# EAGLE board magnetorquer_extension_board_f1 (EAGLE 8.4.2)
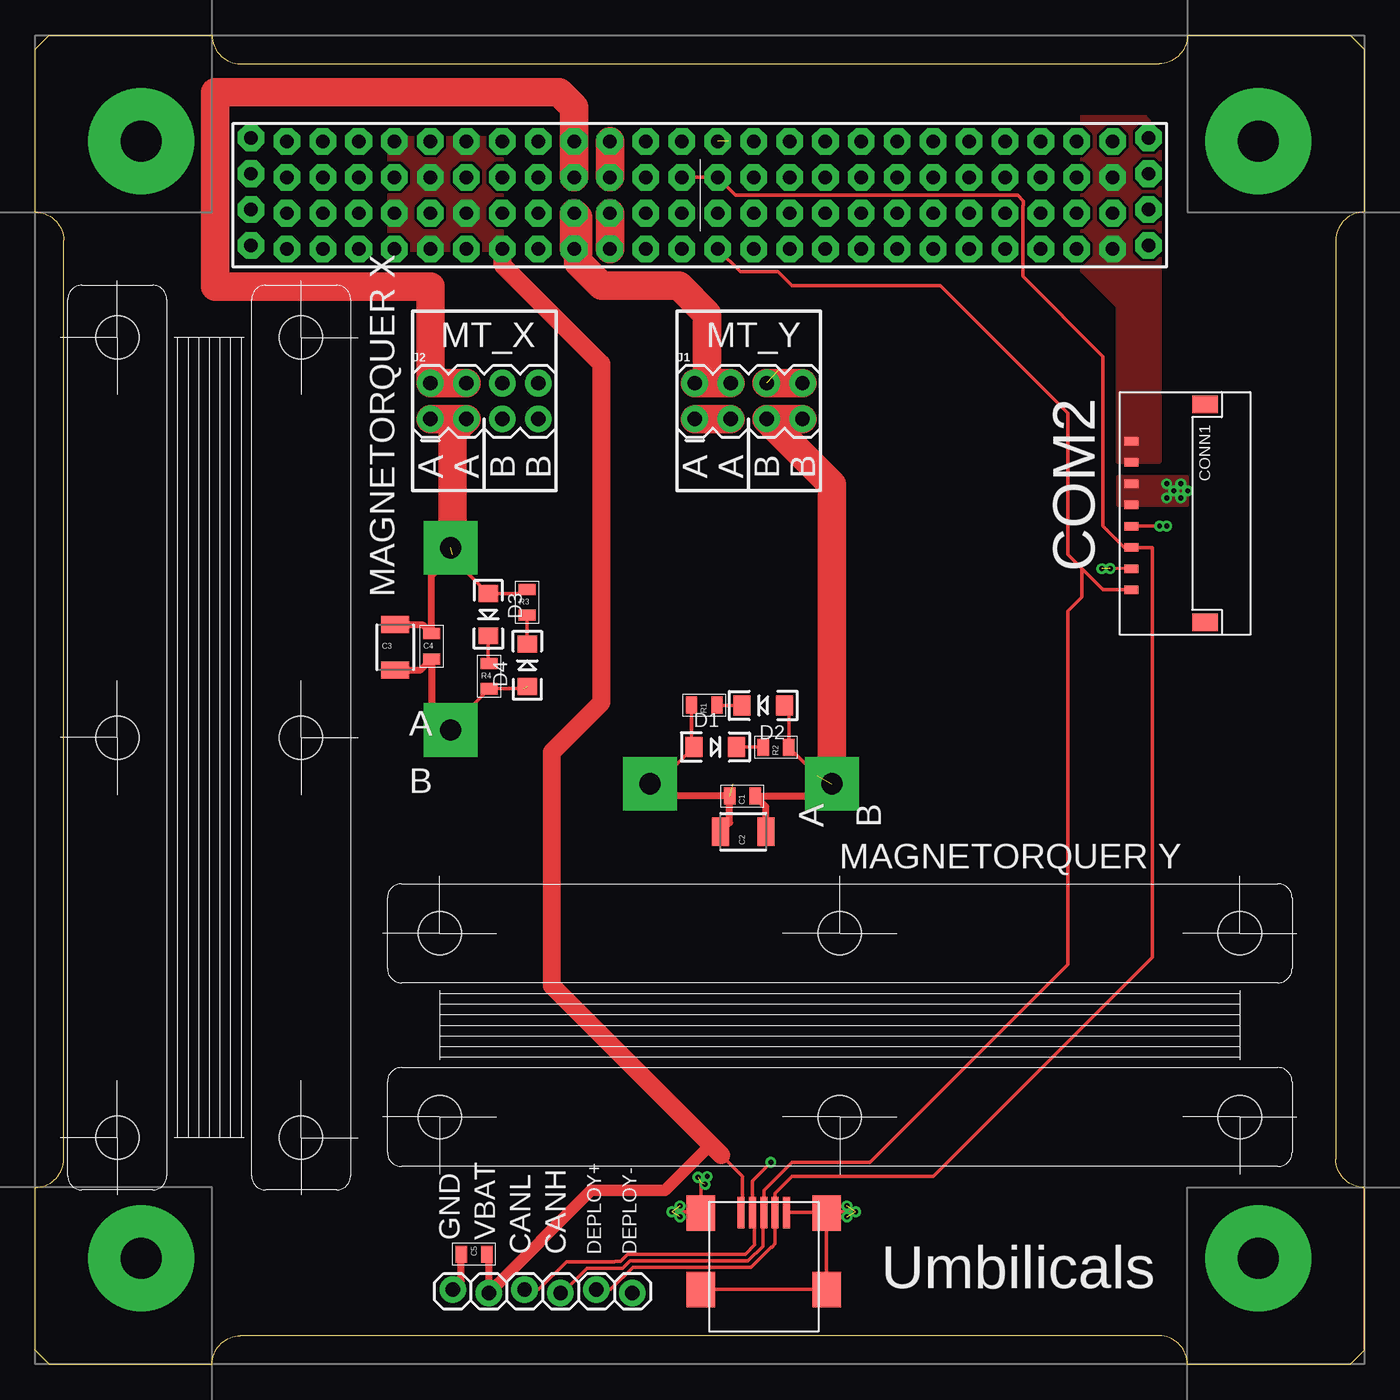
[diagram p0: board, top side]
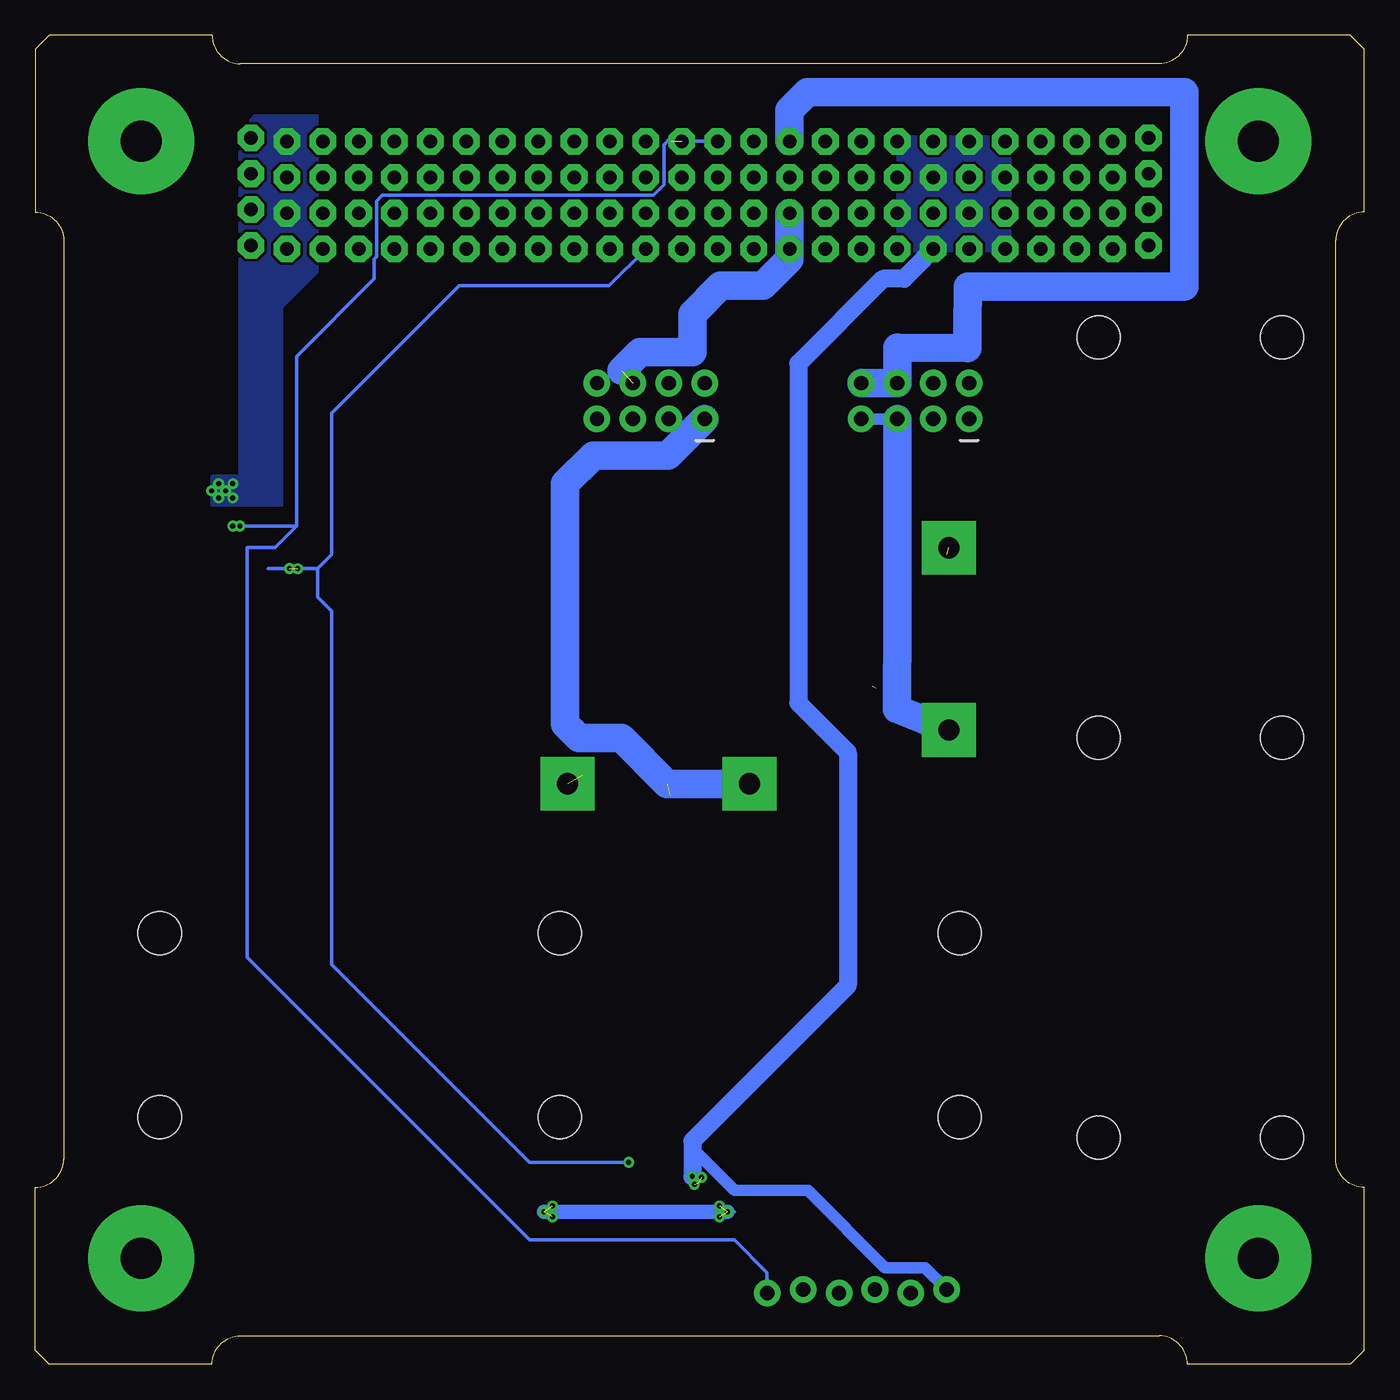
[diagram p1: board, bottom side, seen from below]

Size 94 x 94 mm. Coordinates in mm from the lower left corner, seen from the top.
Copper layers (1*16): Top 0.035mm / dielectric 1.5mm / Bottom 0.035mm
Design rules "default *": minimum track width 10mil, minimum drill 0.4mm, track to track 8mil, track to pad 8mil, pad to pad 8mil, via to via 8mil, smd to smd 6mil, copper to edge 40mil, drill to drill 6mil, minimum pad ring 10mil, minimum via ring 8mil, stop-mask expansion 4mil, vias tented up to drill 0mil, thermal gap 10mil

## Footprints (pad centres in the part's own frame; a part is rotated, then mirrored left to right if it is on the bottom)
0805 = smd 0.8 x 1.2: 1 -0.9,0; 2 0.9,0
1210 = smd 1.2 x 2: 1 -1.6,0; 2 1.6,0
PICOLOCK_8 = smd 1.25 x 1.8: MNT@1 -2.605,5.2; MNT@2 12.805,5.2 | smd 0.6 x 1: P$1 0,0; P$2 1.5,0; P$3 3,0; P$4 4.5,0; P$5 6,0; P$6 7.5,0; P$7 9,0; P$8 10.5,0
LED-1206 = smd 1.2 x 1.4: A -1.5,0; C 1.5,0
2X4 = drill 1.016 pad 1.88: 1 -3.81,-1.27; 2 -3.81,1.27; 3 -1.27,-1.27; 4 -1.27,1.27; 5 1.27,-1.27; 6 1.27,1.27; 7 3.81,-1.27; 8 3.81,1.27
1X06_LOCK = drill 1.016 pad 1.88: 1 0,0; 2 2.54,-0.254; 3 5.08,0; 4 7.62,-0.254; 5 10.16,0; 6 12.7,-0.254
MT_AIRCORE_HORIZONTAL = drill 1.5 pad 3.81 square: A 18.57,27.08; B 31.46,27.08 | hole 3.05: 3.7,16.5; 32,16.5; 60.3,16.5; 60.3,3.5; 32,3.5; 3.7,3.5
PC104_CONNECTOR = drill 0.953 pad 1.88 octagon: P$1 -31.75,32.134; P$2 -31.75,34.674; P$3 -31.75,37.214; P$4 -31.75,39.754; P$5 -29.21,31.88; P$6 -29.21,34.42; P$7 -29.21,36.96; P$8 -29.21,39.5; P$9 -26.67,31.88; P$10 -26.67,34.42; P$11 -26.67,36.96; P$12 -26.67,39.5; P$13 -24.13,31.88; P$14 -24.13,34.42; P$15 -24.13,36.96; P$16 -24.13,39.5; P$17 -21.59,31.88; P$18 -21.59,34.42; P$19 -21.59,36.96; P$20 -21.59,39.5; P$21 -19.05,31.88; P$22 -19.05,34.42; P$23 -19.05,36.96; P$24 -19.05,39.5; P$25 -16.51,31.88; P$26 -16.51,34.42; P$27 -16.51,36.96; P$28 -16.51,39.5; P$29 -13.97,31.88; P$30 -13.97,34.42; P$31 -13.97,36.96; P$32 -13.97,39.5; P$33 -11.43,31.88; P$34 -11.43,34.42; P$35 -11.43,36.96; P$36 -11.43,39.5; P$37 -8.89,31.88; P$38 -8.89,34.42; P$39 -8.89,36.96; P$40 -8.89,39.5; P$41 -6.35,31.88; P$42 -6.35,34.42; P$43 -6.35,36.96; P$44 -6.35,39.5; P$45 -3.81,31.88; P$46 -3.81,34.42; P$47 -3.81,36.96; P$48 -3.81,39.5; P$49 -1.27,31.88; P$50 -1.27,34.42; P$51 -1.27,36.96; P$52 -1.27,39.5; P$53 1.27,31.88; P$54 1.27,34.42; P$55 1.27,36.96; P$56 1.27,39.5; P$57 3.81,31.88; P$58 3.81,34.42; P$59 3.81,36.96; P$60 3.81,39.5; P$61 6.35,31.88; P$62 6.35,34.42; P$63 6.35,36.96; P$64 6.35,39.5; P$65 8.89,31.88; P$66 8.89,34.42; P$67 8.89,36.96; P$68 8.89,39.5; P$69 11.43,31.88; P$70 11.43,34.42; P$71 11.43,36.96; P$72 11.43,39.5; P$73 13.97,31.88; P$74 13.97,34.42; P$75 13.97,36.96; P$76 13.97,39.5; P$77 16.51,31.88; P$78 16.51,34.42; P$79 16.51,36.96; P$80 16.51,39.5; P$81 19.05,31.88; P$82 19.05,34.42; P$83 19.05,36.96; P$84 19.05,39.5; P$85 21.59,31.88; P$86 21.59,34.42; P$87 21.59,36.96; P$88 21.59,39.5; P$89 24.13,31.88; P$90 24.13,34.42; P$91 24.13,36.96; P$92 24.13,39.5; P$93 26.67,31.88; P$94 26.67,34.42; P$95 26.67,36.96; P$96 26.67,39.5; P$97 29.21,31.88; P$98 29.21,34.42; P$99 29.21,36.96; P$100 29.21,39.5; P$101 31.75,32.134; P$102 31.75,34.674; P$103 31.75,37.214; P$104 31.75,39.754
BOARD_TEMPLATE_SECURED = drill 2.9 pad 7.5: P$1 -39.5,39.5; P$2 -39.5,-39.5; P$3 39.5,-39.5; P$4 39.5,39.5
USB_MINI_B = smd 0.5 x 2.25: DATA+ 0,5.45; DATA- -0.8,5.45; GROUND 1.6,5.45; ID 0.8,5.45; VCC -1.6,5.45 | smd 2 x 2.5: GND1 -4.45,0; GND2 -4.45,5.42; GND3 4.45,0; GND4 4.45,5.42

## Placement (x,y rotation side)
C1  [0805]  50.01,40.19 0 top
C2  [1210]  50.08,37.67 0 top
C3  [1210]  25.45,50.72 270 top
C4  [0805]  28.03,50.78 270 top
C5  .1u  [0805]  31.03,7.78 180 top
CONN1  PICOLOCK_8PICOLOCK_8  [PICOLOCK_8]  77.53,65.28 270 top
D1  [LED-1206]  48.1,43.65 0 top
D2  [LED-1206]  51.5,46.6 180 top
D3  [LED-1206]  32.04,53.03 270 top
D4  [LED-1206]  34.8,49.45 90 top
J1  [2X4]  50.46,68.13 0 top
J2  [2X4]  31.76,68.13 0 top
JP1  [1X06_LOCK]  29.53,5.28 0 top
MT_X  MT_AIRCORE_HORIZONTAL  [MT_AIRCORE_HORIZONTAL]  24.9,13.98 0 top
MT_Y  MT_AIRCORE_HORIZONTAL  [MT_AIRCORE_HORIZONTAL]  2.3,76.32 270 top
R1  [0805]  47.32,46.61 0 top
R2  [0805]  52.39,43.63 0 top
R3  [0805]  34.78,53.9 270 top
R4  [0805]  32.1,48.67 270 top
U$1  PC104_CONNECTOR  [PC104_CONNECTOR]  47,47 0 top
U$2  BOARD_TEMPLATESERCURED  [BOARD_TEMPLATE_SECURED]  47,47 0 top
U$3  USB_MINI-B_AMPHENOL  [USB_MINI_B]  51.53,5.28 0 top

## Library data of the parts
C1-C5 CONN1 D1-D4 MT_X MT_Y R1-R4 U$1 U$2 = DubSat1 Components
J1 J2 JP1 = SparkFun-Connectors
U$3 = I_O_connectors

## Nets
CANH: CONN1.P$8 JP1.4 U$1.P$53 U$3.DATA+
CANL: CONN1.P$7 JP1.3 U$1.P$57 U$3.DATA-
COM2_GND: CONN1.P$3 CONN1.P$4 U$1.P$98 U$1.P$100
COM2_VBAT: CONN1.P$1 CONN1.P$2 U$1.P$97 U$1.P$99
GND: C5.2 JP1.1 U$1.P$17 U$1.P$19 U$1.P$22 U$1.P$24 U$1.P$25 U$1.P$27 U$1.P$30 U$1.P$32 U$3.GND1 U$3.GND2 U$3.GND3 U$3.GND4 U$3.GROUND
MT_X_A: C3.1 C4.1 D3.A J2.1 J2.3 MT_Y.A R3.1
MT_X_A_STACK: J2.2 J2.4 U$1.P$39 U$1.P$40
MT_X_B: C3.2 C4.2 D4.A J2.5 J2.7 MT_Y.B R4.2
MT_X_B_STACK: J2.6 J2.8 U$1.P$43 U$1.P$44
MT_Y_A: C1.1 C2.1 D1.A J1.1 J1.3 MT_X.A R1.1
MT_Y_A_STACK: J1.2 J1.4 U$1.P$37 U$1.P$38
MT_Y_B: C1.2 C2.2 D2.A J1.5 J1.7 MT_X.B R2.2
MT_Y_B_STACK: J1.6 J1.8 U$1.P$41 U$1.P$42
N$2: D1.C R2.1
N$3: D2.C R1.2
N$4: D3.C R4.1
N$5: D4.C R3.2
TOPDEPLOY+: CONN1.P$6 JP1.5 U$1.P$51 U$1.P$55 U$3.ID
TOPDEPLOY-: CONN1.P$5 JP1.6 U$1.P$52 U$1.P$56
VBAT: C5.1 JP1.2 U$1.P$18 U$1.P$20 U$1.P$21 U$1.P$23 U$1.P$26 U$1.P$28 U$1.P$29 U$3.VCC

## Tracks (layer width: path | path; a pad name or v marks a point on that pad's centre or on a via)
CANH
  Top 0.254: U$1.P$53 49.87,77.28 52.53,77.28 53.53,76.28 64.03,76.28 73.03,67.28 73.03,57.28 74.03,56.28 | CONN1.P$8 75.53,54.78 74.03,56.28 | 74.03,56.28 74.03,54.28 73.03,53.28 73.03,28.28 59.03,14.28 53.53,14.28 51.53,12.28 U$3.DATA+ 51.46,10.66 51.46,8.35 50.42,7.32 42.08,7.32 41.54,6.78 39.03,6.78 37.28,5.03 JP1.4
CANL  (via drill 0.35)  (1 unrouted)
  Top 0.203: CONN1.P$7 v76.03,56.28
  Top 0.254: v52.03,14.28 50.73,12.98 U$3.DATA- 50.88,10.58 50.88,8.43 50.23,7.78 41.89,7.78 41.39,7.28 41.03,7.28 40.99,7.24 37.56,7.24 35.61,5.28 JP1.3
  Bottom 0.254: U$1.P$57 53.41,76.28 64.03,76.28 73.03,67.28 73.03,57.28 74.03,56.28 | 74.03,56.28 v76.03,56.28 CONN1.P$7 | 74.03,56.28 74.03,54.28 73.03,53.28 73.03,28.28 59.03,14.28 v52.03,14.28
  other vias: 75.45,56.27
COM2_GND  (via drill 0.35)
  other vias: 80.53,61.78 80.03,62.28 80.03,61.28 81.03,61.28 81.53,61.78 81.03,62.28
  pour Bottom (no thermals): 76.53,60.78 76.53,74.78 74.03,77.28 74.03,88.28 78.53,88.28 79.53,87.28 79.53,62.78 81.53,62.78 81.53,60.78
  pour Top (no thermals): 76.53,60.78 81.53,60.78 81.53,62.78 76.53,62.78
COM2_VBAT
  pour Top (no thermals): 76.53,63.78 76.53,74.78 74.03,77.28 74.03,88.28 78.53,88.28 79.53,87.28 79.53,63.78
GND  (via drill 0.35)  (6 unrouted)
  Top 0.254: 47.08,10.78 U$3.GND2 | 47.08,10.78 47.08,12.83 v47.53,13.28 | U$3.GND4 U$3.GND3 U$3.GND1 | U$3.GND4 55.95,10.73 U$3.GROUND | U$3.GND4 56.06,10.78 v58.03,10.78 | v45.03,10.78 47.08,10.78
  Top 0.508: JP1.1 30.13,5.88 C5.2
  Bottom 0.254: 44.53,10.78 v45.03,10.78
  Bottom 0.813: JP1.1 31.08,6.83 33.9,6.83 39.35,12.28 44.53,12.28 47.53,15.28 47.53,15.78
  Bottom 1.016: v58.03,10.78 v45.03,10.78
  Bottom 1.27: U$1.P$25 31.2,78.17 31.2,78.12 32.54,76.78 34.03,76.78 40.03,70.78 40.03,46.78 36.53,43.28 36.53,26.78 47.53,15.78 v47.53,13.28
  other vias: 46.87,13.22 47.38,12.71 45.6,11.19 45.6,10.42 57.41,11.19 57.41,10.42
  pour Bottom (no thermals): 25.03,78.78 25.03,86.28 25.53,86.78 33.03,86.78 33.03,78.78
MT_X_A  (1 unrouted)
  Top 0.254: R3.1 34.51,54.53 D3.A 29.53,57.03 29.53,57.28
  Top 0.508: C3.1 27.39,52.32 C4.1 28.03,55.78 29.53,57.28
  Top 2: J2.3 29.53,65.9 29.53,57.28
  Top 2.032: J2.1 J2.3
MT_X_A_STACK
  Top 2.032: J2.4 J2.2 27.95,76.21 12.71,76.21 12.71,89.97 37.05,89.97 38.11,88.91 U$1.P$40 U$1.P$39
MT_X_B  (1 unrouted)
  Top 0.254: 34.53,47.78 R4.2 29.38,45.05 MT_Y.B
  Top 0.508: C3.2 27.27,49.12 C4.2 28.03,46.21 MT_Y.B
  Bottom 0.813: J2.5 J2.7
  Bottom 2: MT_Y.B 33.06,46.33 33.03,52.78 J2.5
MT_X_B_STACK
  Top 2.032: U$1.P$44 U$1.P$43
  Bottom 2: J2.6 J2.8
  Bottom 2.032: U$1.P$44 40.65,88.7 39.38,89.97 12.71,89.97 12.71,76.21 28.03,76.21 28.05,73.31 28.05,71.88 33.03,71.89 J2.6
MT_Y_A  (1 unrouted)
  Top 0.254: R1.1 46.42,43.84 D1.A 45.23,42.28 44.53,42.28 44.53,42.12 MT_X.A
  Top 0.508: C2.1 49.11,38.31 C1.1 44.44,40.19 44.03,39.78
  Top 2.032: J1.1 J1.3
  Bottom 2: J1.1 49.23,64.28 54.53,64.28 56.53,62.28 56.53,45.28 55.53,44.28 52.53,44.28 49.31,41.06 MT_X.A
MT_Y_A_STACK
  Top 2: U$1.P$38 38.38,81.15 38.38,77.94 40.04,76.28 45.53,76.28 47.53,74.28 47.53,69.4
  Top 2.032: J1.2 47.53,69.4 J1.4 | U$1.P$37 U$1.P$38
MT_Y_B  (1 unrouted)
  Top 0.254: D2.A 53.29,46.31 R2.2 55.28,41.64 55.28,40.03
  Top 0.508: C2.2 51.68,39.42 C1.2 55.12,40.19 55.28,40.03 55.53,39.78
  Top 2: J1.5 56.36,62.23 MT_X.B
  Top 2.032: J1.7 J1.5
MT_Y_B_STACK  (1 unrouted)
  Top 2.032: J1.6 J1.8 | U$1.P$42 U$1.P$41
  Bottom 2: U$1.P$42 40.65,78.16 42.53,76.28 45.53,76.28 47.53,74.28 47.53,71.59 51.22,71.59 52.53,70.28
N$2
  Top 0.254: D1.C 51.47,43.65 R2.1
N$3
  Top 0.254: R1.2 48.23,46.6 D2.C
N$4
  Top 0.254: R4.1 32.04,49.63 D3.C
N$5
  Top 0.254: D4.C 34.78,50.96 R3.2
TOPDEPLOY+
  Top 0.254: U$1.P$51 U$1.P$55 49.54,82.69 69.5,82.69 69.91,82.28 69.9,82.15 69.9,81.99 69.86,81.95 69.86,76.95 75.53,71.28 75.53,59.28 77.03,57.78 CONN1.P$6 79.03,57.78 79.03,28.78 63.53,13.28 53.53,13.28 52.33,12.08 U$3.ID 52.33,8.52 52.09,8.28 52.03,8.28 50.61,6.86 42.27,6.86 40.69,5.28 JP1.5
TOPDEPLOY-  (via drill 0.35)  (1 unrouted)
  Top 0.254: v79.53,59.28 CONN1.P$5
  Bottom 0.254: U$1.P$52 49.03,86.5 49.03,86.78 49.54,86.27 49.54,83.43 50.28,82.69 69.46,82.69 69.86,82.29 69.86,78.35 70.03,78.18 70.03,76.78 75.53,71.28 75.53,59.28 | 75.53,59.28 v79.53,59.28 | v79.53,59.28 v80.03,59.28 v79.53,59.28 | 75.53,59.28 77.03,57.78 79.03,57.78 79.03,28.78 59.03,8.78 44.53,8.78 42.23,6.48 JP1.6
VBAT
  Top 0.254: 47.53,15.78 50.03,13.28 50.03,10.83 U$3.VCC
  Top 0.508: C5.1 32.07,7.64 JP1.2
  Top 0.813: JP1.2 39.32,12.28 44.53,12.28 47.53,15.28 47.53,15.78
  Top 1.27: U$1.P$29 33.03,77.78 40.03,70.78 40.03,46.78 36.53,43.28 36.53,26.78 47.53,15.78 48.53,14.78
  pour Top (no thermals): 25.03,78.78 25.03,86.28 25.53,86.78 33.03,86.78 33.03,78.78

## Text on the board
tSilk: MT_X | MT_Y | A | A | B | B | A | A | B | B | MAGNETORQUER X | A | B | A | B | MAGNETORQUER Y
_tsilk: COM2 | GND | VBAT | CANL | CANH | DEPLOY+ | DEPLOY- | Umbilicals